# Altium PCB wifiPinBoard_1.pcbdoc (part 2 of 2)
Units mil, origin at the board's own origin, x right, y up, seen from the top; angles counter-clockwise.
Board outline 4044.61 x 2473.5 mil, 2 copper layers (Top Layer, Bottom Layer); 86 components, 80 nets, 330 pads, 327 vias.
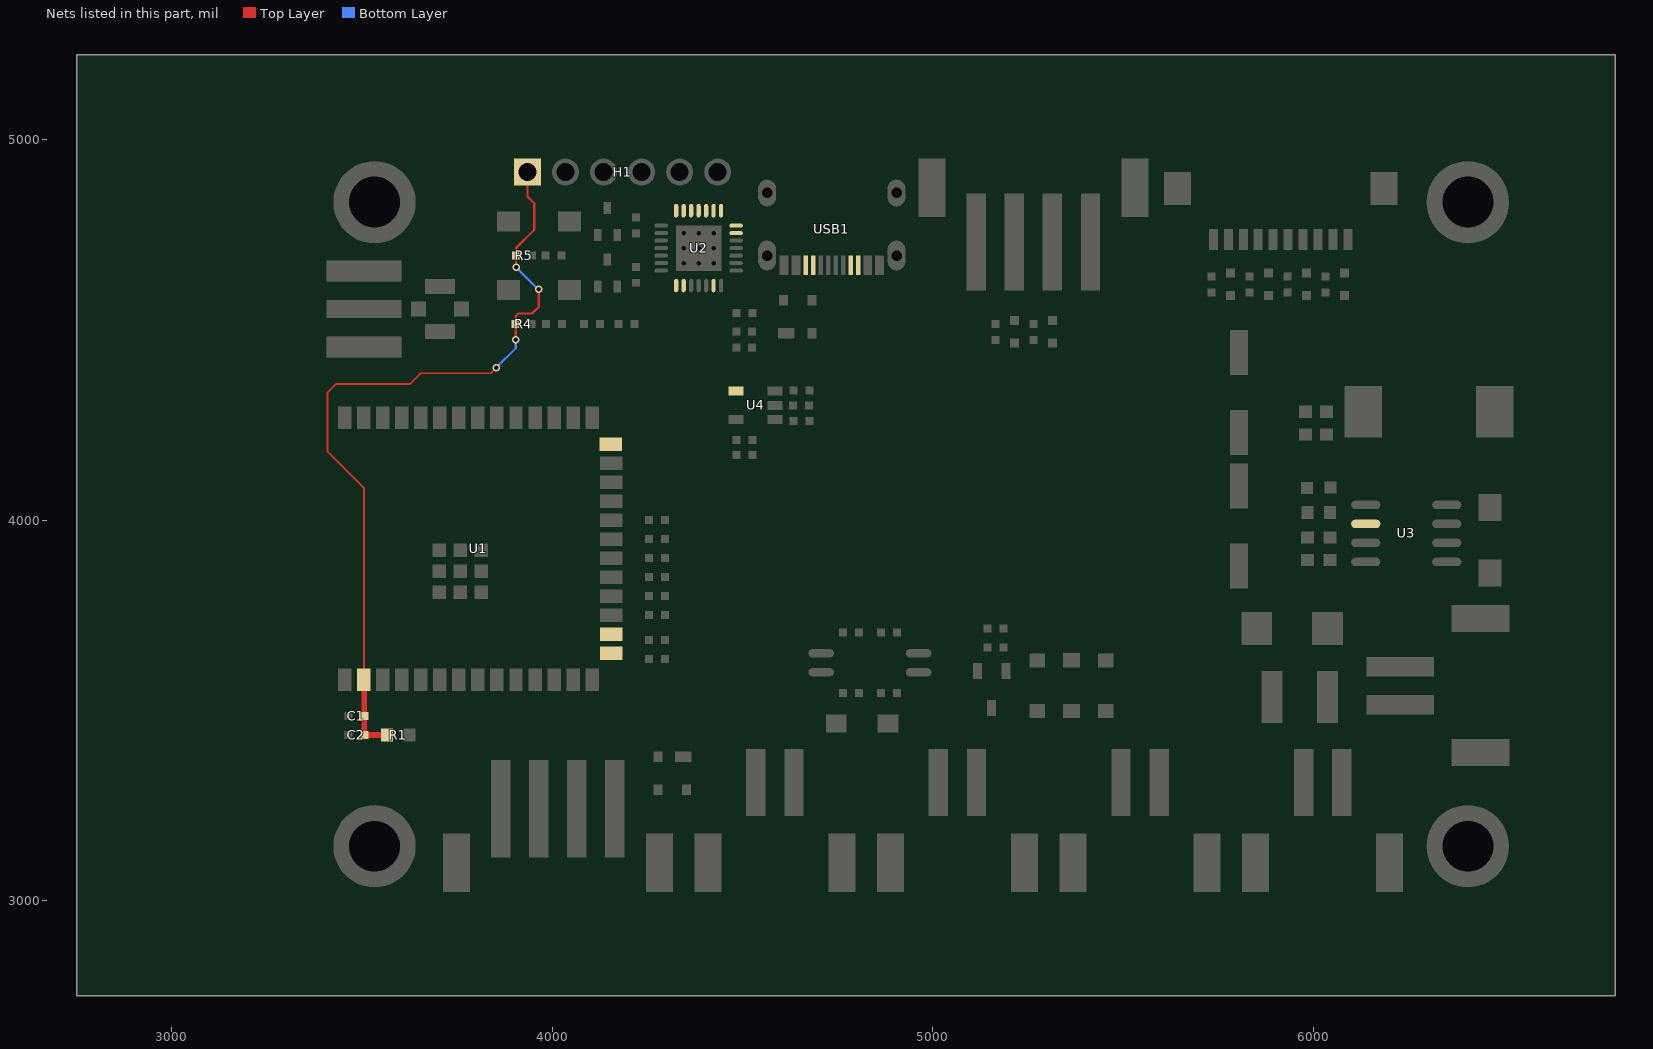
[diagram p2: the nets of this part, all layers, seen from the top]

## Via types
v1: diameter 19.68, hole 11.81, Top Layer to Bottom Layer, 286 vias
v2: diameter 62.99, hole 35.43, Top Layer to Bottom Layer, 22 vias
v3: diameter 19.7, hole 11.81, Top Layer to Bottom Layer, 17 vias
v4: diameter 27.56, hole 15.75, Top Layer to Bottom Layer, 2 vias

## Nets (pads, with @x,y where several pads share a name; then routed paths per layer and width w, separated by ;. In a path a pad name is that pad's centre, name@x,y a point inside that pad or via, vN(x,y) a via of type N, cw(c..) or ccw(c..) an arc to the next point about the centre after c; other vN are vias at no path point) (continued)
VDD3V3: C1.1 C2.1 H1.1 R1.2 R4.2 R5.2 U1.2 | length 2105.4
  Top Layer w5: U1.2@3504.8,3580.51 3504.8,4085.2 3409,4181 3409,4334.56 3432.79,4358.34 3626.34,4358.34 3654,4386 3838,4386 v1(3853,4401)
  Top Layer w6: v1(3904,4474) R4.2@3904,4515 3904,4536 3911,4543 3947,4543 3965,4561 v1(3965,4607) ; v1(3905,4665) R5.2@3905,4695 3905,4715 3953,4763 3953,4833 3935,4851 H1.1@3935,4915
  Top Layer w15: U1.2@3504.8,3580.51 3506,3579.32 C1.1@3506,3485 C2.1@3506,3435 R1.2@3565.3,3435
  Bottom Layer w6: v1(3853,4401) 3904,4452 v1(3904,4474) ; v1(3905,4665) 3963,4607 v1(3965,4607)
"": U1.15 U1.16 U1.26 U2.1 U2.2 U2.6 U2.13 U2.14 U2.15 U2.16 U2.17 U2.18 U2.19 U2.20 U2.21 U3.2 U4.4 USB1.A5 USB1.A8 USB1.B5 USB1.B8

## Polygon pours and split planes (outlines as drawn)
GND on Bottom Layer (solid, remove dead copper, pour order 0): 3513.11,4973.5 ccw(c3513.11,4855.39) 3395,4855.39 3395,3123.11 ccw(c3513.11,3123.11) 3513.11,3005 6426.5,3005 ccw(c6426.5,3123.11) 6544.61,3123.11 6544.61,4855.39 ccw(c6426.5,4855.39) 6426.5,4973.5
GND on Top Layer (solid, remove dead copper, pour order 1): 3513.11,4968.5 ccw(c3513.11,4850.39) 3395,4850.39 3395,3118.11 ccw(c3513.11,3118.11) 3513.11,3000 6426.5,3000 ccw(c6426.5,3118.11) 6544.61,3118.11 6544.61,4850.39 ccw(c6426.5,4850.39) 6426.5,4968.5

## Keep-outs
Board Outline Layer:
  lines w10 net "": 3395,3123.11 3395,4855.39 cw(c3513.11,4855.39) 3513.11,4973.5 6426.5,4973.5 cw(c6426.5,4855.39) 6544.61,4855.39 6544.61,3123.11 cw(c6426.5,3123.11) 6426.5,3005 3513.11,3005 cw(c3513.11,3123.11) 3395,3123.11

## Other copper
Top Layer:
  region net 12V: 6175,3910 6080,3910 6075,3915 5810.1,3915 5809.86,3855 6170,3855 6185,3870 6185,3900
  region net $1N33521: 6430,4355 6425,4350 6425,3990 6390,3955 6315,3955 6305,3945 6305,3885 6315,3875 6390,3875 6530,4015 6530,4350 6525,4355
  region net 12V: 5770,3906.66 5770,3480 5800,3450 5905,3450 5920,3465 5920,3819.57 5945.45,3856.66 5945.45,3906.66
  region net VCC: 6340,3640 6330,3650 6110,3650 6090,3630 6010,3630 5995,3615 5995,3460 6040,3415 6040,3214.45 6050.95,3203.49 6098.49,3203.49 6110,3215 6110,3545 6145,3580 6330,3580 6340,3590
  region net 5V: 6180,4025 6190,4035 6190,4382 6245,4437 6245,4664.09 6120,4789.09 6120,4814 6105,4829 6023,4829 5999,4805 5999,4713 6006,4706 6110,4706 6180,4636 6180,4550 6134,4504 5780,4504 5765,4489 5765,4385 5780,4370 5850,4370 5955,4265 6055,4265 6090,4230 6090,4030 6095,4025
  region net 5V: 4629,4779 4654,4804 4818.43,4804 4840.26,4782.17 4840.26,4669.92 4818.47,4669.92 4818.47,4737.53 4791,4765 4673,4765 4652,4744 4652,4675.51 4646.42,4669.93 4634.6,4669.93 4629,4675.53
  region net DTR: 4239.5,4627 4230.5,4634.5 4230.5,4613.5 4239.5,4621
  region net DTR: 4202,4621 4209.5,4613.5 4209.5,4634.5 4202,4627
  region net $1N10942: 4200.5,4669 4200.5,4663 4209.5,4655.5 4209.5,4676.5
  region net RTS: 4202,4751.5 4209.5,4745.25 4209.5,4762.75 4202,4756.5
  region net RTS: 4238,4756.5 4230.5,4762.75 4230.5,4745.25 4238,4751.5
  region net $1N10943: 4200.5,4793 4209.5,4785.5 4209.5,4806.5 4200.5,4799
  region net 5V: 4510.5,4501 4495.5,4506.5 4495.5,4485.5 4510.5,4491
  region net 5V: 4480,4521.5 4474.5,4506.5 4495.5,4506.5 4490,4521.5
  region net 5V: 4550.5,4501 4535.5,4506.5 4535.5,4485.5 4550.5,4491
  region net 5V: 4499.5,4501 4499.5,4491 4514.5,4485.5 4514.5,4506.5
  region net $1N10958: 4524,4564.5 4516.5,4555.5 4536.5,4555.5 4530,4564.5
  region net 5V: 4488.4,4570.5 4478.4,4570.5 4473.5,4555.5 4494.5,4555.5
  region net 5V: 4480,4519.5 4490,4519.5 4494.5,4534.5 4473.5,4534.5
  region net VDD3V3: 3507.3,3617.54 3502.3,3617.54 3496.05,3610.04 3513.55,3610.04
  region net VDD3V3: 3498.5,3528.48 3513.5,3528.48 3522.52,3550.98 3487.09,3550.98
  region net EN: 3557.3,3617.54 3552.3,3617.54 3546.05,3610.04 3563.55,3610.04
  region net IO6: 3701.8,3541.98 3707.8,3541.98 3715.3,3550.98 3694.3,3550.98
  region net IO7: 3751.8,3541.98 3757.8,3541.98 3765.3,3550.98 3744.3,3550.98
  region net IO17: 3901.8,3541.98 3907.8,3541.98 3915.3,3550.98 3894.3,3550.98
  region net IO18: 3951.8,3541.98 3957.8,3541.98 3965.3,3550.98 3944.3,3550.98
  region net IO19: 4057.8,3543.2 4065.3,3550.98 4044.3,3550.98 4051.8,3543.2
  region net IO20: 4131.52,3583.51 4122.52,3591.01 4122.52,3570.01 4131.52,3577.51
  region net IO9: 4193.72,3753 4184.72,3760.5 4184.72,3739.5 4193.72,3747
  region net IO10: 4193.72,3803 4184.72,3810.5 4184.72,3789.5 4193.72,3797
  region net IO11: 4193.72,3853 4184.72,3860.5 4184.72,3839.5 4193.72,3847
  region net IO12: 4193.72,3903 4184.72,3910.5 4184.72,3889.5 4193.72,3897
  region net IO13: 4193.72,3953 4184.72,3960.5 4184.72,3939.5 4193.72,3947
  region net IO14: 4193.72,4003 4184.72,4010.5 4184.72,3989.5 4193.72,3997
  region net IO0: 4107.81,4308.02 4101.81,4308.02 4094.3,4299.02 4115.31,4299.02
  region net RXD0: 3651.8,4308.02 3644.3,4299.02 3665.3,4299.02 3657.8,4308.02
  region net TXD0: 3607.8,4308.02 3601.8,4308.02 3594.3,4299.02 3615.3,4299.02
  region net VDD3V3: 3902,4675.5 3908,4675.5 3915.5,4684.5 3894.5,4684.5
  region net VDD3V3: 3908,4714.5 3902,4714.5 3894.5,4705.5 3915.5,4705.5
  region net EN: 3947.5,4677 3953.75,4684.5 3936.5,4684.5 3942.5,4677
  region net EN: 3966.5,4698 3957.5,4705.5 3957.5,4684.5 3966.5,4692
  region net EN: 3963.5,4698 3963.5,4692 3972.5,4684.5 3972.5,4705.5
  region net EN: 3980,4714.5 3972.5,4705.5 3993.5,4705.5 3986,4714.5
  region net EN: 4006,4788 4006,4782 4015,4774.5 4015,4795.5
  region net EN: 4084.24,4788 4075.24,4795.5 4075.24,4774.5 4084.24,4782
  region net VDD3V3: 3901,4534.5 3893.5,4525.5 3914.5,4525.5 3907,4534.5
  region net VDD3V3: 3907,4495.5 3914.5,4504.5 3893.5,4504.5 3901,4495.5
  region net IO0: 3965.5,4518 3956.5,4525.5 3956.5,4504.5 3965.5,4512
  region net IO0: 3964.5,4518 3964.5,4512 3973.5,4504.5 3973.5,4525.5
  region net IO0: 3987,4534.5 3981,4534.5 3973.5,4525.5 3994.5,4525.5
  region net IO0: 4006,4602 4015,4594.5 4015,4615.5 4006,4608
  region net IO0: 4084.24,4602 4084.24,4608 4075.24,4615.5 4075.24,4594.5
  region net VDD3V3: 3539,3442.5 3516.5,3445.5 3516.5,3424.5 3539,3427.5
  region net VDD3V3: 3498.5,3468 3495.5,3445.5 3516.5,3445.5 3513.5,3468
  region net VDD3V3: 3498.5,3452 3513.5,3452 3516.5,3474.5 3495.5,3474.5
  region net VDD3V3: 3498.5,3518 3495.5,3495.5 3516.5,3495.5 3513.5,3518
  region net VDD3V3: 3526.9,3442.5 3526.9,3427.5 3549.4,3418 3549.4,3452
  region net 3V3: 3663.1,3427.5 3663.1,3442.5 3640.6,3452 3640.6,3418
  region net IO9: 4234.5,3753 4234.5,3747 4243.5,3739.5 4243.5,3760.5
  region net $1N8464: 4315.5,3747 4315.5,3753 4306.5,3760.5 4306.5,3739.5
  region net IO10: 4234.5,3803 4234.5,3797 4243.5,3789.5 4243.5,3810.5
  region net $1N8479: 4315.5,3797 4315.5,3803 4306.5,3810.5 4306.5,3789.5
  region net IO11: 4234.5,3853 4234.5,3847 4243.5,3839.5 4243.5,3860.5
  region net IO12: 4234.5,3903 4234.5,3897 4243.5,3889.5 4243.5,3910.5
  region net IO13: 4235.5,3953 4235.5,3947 4244.5,3939.5 4244.5,3960.5
  region net IO14: 4234.5,4003 4234.5,3997 4243.5,3989.5 4243.5,4010.5
  region net RXD0: 4171,4495.5 4177,4495.5 4184.5,4504.5 4163.5,4504.5
  region net $1N13324: 4219,4534.5 4213,4534.5 4205.5,4525.5 4226.5,4525.5
  region net TXD0: 4087,4495.5 4094.5,4504.5 4073.5,4504.5 4081,4495.5
  region net $1N13323: 4129,4534.5 4123,4534.5 4115.5,4525.5 4136.5,4525.5
  region net SRC_RX2: 5962.19,4652.53 5962.19,4646.53 5971.19,4639.03 5971.19,4660.03
  region net SRC_RX2: 5986,4670.34 5980,4670.34 5972.5,4661.34 5993.5,4661.34
  region net SRC_TX2: 5862.19,4652.53 5862.19,4646.53 5871.19,4639.03 5871.19,4660.03
  region net SRC_TX2: 5886,4670.34 5880,4670.34 5872.5,4661.34 5893.5,4661.34
  region net $1N54194: 4274.6,3355.53 4280.6,3355.53 4288.1,3364.53 4267.1,3364.53
  region net $1N54194: 4256.78,3381.3 4256.78,3375.3 4265.78,3367.8 4265.78,3388.8
  region net $1N54195: 4258.31,3288.7 4265.78,3281.2 4265.78,3302.2 4258.31,3294.7
  region net $1N54195: 4280.6,3314.47 4274.6,3314.47 4267.1,3305.47 4288.1,3305.47
  region net 5V: 4332.61,3262.01 4340.59,3277.92 4340.59,3305.47 4324.68,3275.29
  region net 5V: 4386.72,3299.2 4364.22,3305.47 4364.22,3277.92 4386.72,3284.2
  region net EX_RXD: 5194.19,4527.53 5194.19,4521.53 5203.19,4514.03 5203.19,4535.03
  region net EX_RXD: 5212,4545.34 5204.5,4536.34 5225.5,4536.34 5218,4545.34
  region net EX_TXD: 5294.19,4527.53 5294.19,4521.53 5303.19,4514.03 5303.19,4535.03
  region net EX_TXD: 5312,4545.34 5304.5,4536.34 5325.5,4536.34 5318,4545.34
  region net IO7: 5262,4454.5 5268,4454.5 5275.5,4463.5 5254.5,4463.5
  region net EX_TXD: 5284,4519 5275.5,4526.5 5275.5,4505.5 5284,4513
  region net IO6: 5162,4454.5 5168,4454.5 5175.5,4463.5 5154.5,4463.5
  region net EX_RXD: 5182,4519 5175.5,4526.5 5175.5,4505.5 5182,4513
  region net 5V: 6093.18,4021.11 6111.3,4028.81 6111.3,4051.19 6089.78,4031.85
  region net $1N32414: 6090,3930 6111.3,3928.81 6111.3,3951.19 6090,3950
  region net $1N32414: 6075.3,3944.7 6075.3,3964.7 6062,3970.7 6062,3938.7
  region net 3V3: 4490.75,4229.85 4502.95,4252.35 4463.55,4252.35 4475.75,4229.85
  region net $1N37918: 4620.35,4336 4620.35,4346 4605.35,4350.75 4605.35,4327.15
  region net 5V: 4595.65,4222.35 4605.35,4252.35 4565.95,4252.35 4575.65,4222.35
  region net 5V: 4686,4300.5 4686.5,4330.5 4665.5,4330.5 4666,4300.5
  region net 5V: 4666,4381.5 4665.5,4351.5 4686.5,4351.5 4686,4381.5
  region net $1N37918: 4608.5,4336 4623.5,4330.5 4623.5,4351.5 4608.5,4346
  region net $1N71351: 5988.52,4052 5978.52,4052 5969.4,4037 6001.02,4037
  region net 5V: 6075.6,4015 6075.6,4025 6060.6,4037 6060.6,4003
  region net $1N71351: 5988.52,4054.11 5999.27,4069.11 5967.77,4069.11 5978.52,4054.11
  region net 5V: 4666,4220.5 4686,4220.5 4686.5,4250.5 4665.5,4250.5
  region net 5V: 4686,4280 4666,4280 4665.5,4271.5 4686.5,4271.5
  region net 3V3: 4476.5,4178 4491.5,4178 4494.5,4200.5 4473.5,4200.5
  region net 3V3: 4490.75,4244 4475.75,4244 4473.5,4221.5 4494.5,4221.5
  region net 3V3: 4476.5,4204 4473.5,4181.5 4494.5,4181.5 4491.5,4204
  region net 3V3: 4491.5,4138 4494.5,4160.5 4473.5,4160.5 4476.5,4138
  region net IO17: 6036,4579.5 6043.5,4588.5 6022.5,4588.5 6030,4579.5
  region net SRC_RX4: 6062.19,4652.53 6062.19,4646.53 6071.19,4639.03 6071.19,4660.03
  region net SRC_RX4: 6086,4670.34 6080,4670.34 6072.5,4661.34 6093.5,4661.34
  region net SRC_TX4: 5762.19,4652.53 5762.19,4646.53 5771.19,4639.03 5771.19,4660.03
  region net SRC_TX4: 5786,4670.34 5780,4670.34 5772.5,4661.34 5793.5,4661.34
  region net IO17: 5930,4579.5 5936,4579.5 5943.5,4588.5 5922.5,4588.5
  region net IO18: 5836,4579.5 5843.5,4588.5 5822.5,4588.5 5830,4579.5
  region net IO18: 5730,4579.5 5736,4579.5 5743.5,4588.5 5722.5,4588.5
  region net SRC_TX4: 5752.5,4644 5743.5,4651.5 5743.5,4630.5 5752.5,4638
  region net IO20: 4234.5,3688 4234.5,3682 4243.5,3674.5 4243.5,3695.5
  region net $1N54194: 4315.5,3688 4306.5,3695.5 4306.5,3674.5 4315.5,3682
  region net IO19: 4251,3615.5 4257,3615.5 4264.5,3624.5 4243.5,3624.5
  region net $1N54195: 4315.5,3638 4306.5,3645.5 4306.5,3624.5 4315.5,3632
  region net USB-D-: 4761.53,4635.33 4767.53,4635.33 4770.44,4644.33 4758.62,4644.33
  region net USB-D-: 4767.53,4704.51 4761.53,4704.51 4758.62,4695.51 4770.44,4695.51
  region net USB-D+: 4747.84,4635.33 4750.75,4644.33 4738.93,4644.33 4741.84,4635.33
  region net USB-D-: 4722.16,4704.51 4719.25,4695.51 4731.07,4695.51 4728.16,4704.51
  region net USB-D+: 4708.47,4635.33 4711.38,4644.33 4699.56,4644.33 4702.47,4635.33
  region net $1N10942: 4122.41,4724.9 4129.25,4733.9 4109.57,4733.9 4116.41,4724.9
  region net RTS: 4187.93,4751.5 4187.93,4756.5 4180.43,4762.75 4180.43,4745.25
  region net EN: 4126.16,4823.35 4126.16,4817.35 4135.16,4809.85 4135.16,4830.85
  region net EN: 4163.84,4817.35 4163.84,4823.35 4154.84,4830.85 4154.84,4809.85
  region net $1N10943: 4122.41,4639.4 4116.41,4639.4 4109.57,4630.4 4129.25,4630.4
  region net DTR: 4189.43,4611.65 4189.43,4617.65 4180.43,4625.15 4180.43,4604.15
  region net IO0: 4147.5,4662.1 4153.75,4669.6 4136.25,4669.6 4142.5,4662.1
  region net USB-D+: 4685.4,4514.47 4679.4,4514.47 4671.9,4505.47 4692.9,4505.47
  region net USB-D+: 4679.4,4468.92 4685.4,4468.92 4692.9,4477.92 4671.9,4477.92
  region net USB-D-: 4679.4,4555.53 4685.4,4555.53 4692.9,4564.53 4671.9,4564.53
  region net USB-D-: 4679.4,4600.4 4671.9,4592.08 4692.9,4592.08 4685.4,4600.4
  region net 5V: 4602.6,4552.6 4612.6,4552.6 4619.41,4564.53 4595.78,4564.53
  region net 5V: 4602.6,4601.6 4595.78,4592.08 4619.41,4592.08 4612.6,4601.6
  region net $1N83572: 5197.4,3635.6 5187.4,3635.6 5180.59,3624.69 5204.21,3624.69
  region net $1N82815: 5211.81,3491.38 5211.81,3521.38 5166.81,3527.44 5166.81,3485.31
  region net $1N82815: 5098.19,3521 5098.19,3491 5143.19,3485.31 5143.19,3527.44
  region net $1N83572: 5191,3642 5196.5,3654.5 5175.5,3654.5 5181,3642
  region net $1N83572: 5181,3690.5 5175.5,3675.5 5196.5,3675.5 5191,3690.5
  region net $1N83572: 5181,3689.5 5191,3689.5 5196.5,3704.5 5175.5,3704.5
  region net $1N8479: 5147,3734.5 5141,3734.5 5133.5,3725.5 5154.5,3725.5
  region net 12V: 5389.13,3513.37 5389.13,3483.37 5434.13,3480.35 5434.13,3516.97
  region net 12V: 5520.87,3483.66 5520.87,3513.66 5475.87,3516.97 5475.87,3480.35
  region net $1N90372: 4704.14,3470 4704.14,3460 4719.14,3447.5 4719.14,3482.5
  region net $1N90372: 4789.26,3470 4774.26,3482.5 4774.26,3447.5 4789.26,3460
  region net $1N90245: 4911,3570.5 4901,3570.5 4895.5,3555.5 4916.5,3555.5
  region net $1N90372: 4859,3519.5 4869,3519.5 4874.5,3534.5 4853.5,3534.5
  region net 5V: 5010,3610 4985.79,3611.02 4985.79,3588.98 5010,3590
  region net $1N90245: 4916,3645 4940.51,3638.98 4940.51,3661.02 4916,3655
  region net $1N107623: 4754.31,3605 4729.49,3611.02 4729.49,3588.98 4754.31,3595
  region net $1N8464: 4749.1,3653 4732.84,3660.5 4732.84,3639.5 4749.1,3647
  region net 12V: 5610.17,3176.73 5620.76,3221.73 5569.58,3221.73 5580.17,3176.73
  region net 12V: 5608,3443.9 5578,3443.9 5569.58,3398.9 5620.76,3398.9
  region net $1N82815: 5510.18,3176.73 5520.77,3221.73 5469.59,3221.73 5480.18,3176.73
  region net $1N82815: 5424.59,3325.32 5424.59,3295.32 5469.59,3257.82 5469.59,3362.82
  region net 12V: 5100.37,3416.37 5089.78,3398.9 5140.96,3398.9 5130.37,3416.37
  region net $1N82815: 5000.38,3443.9 4989.79,3398.9 5040.97,3398.9 5030.38,3443.9
  region net $1N82815: 5030.38,3176.73 5040.97,3221.73 4989.79,3221.73 5000.38,3176.73
  region net VCC: 6363.27,3629.97 6318.27,3640.57 6318.27,3589.38 6363.27,3599.97
  region net VCC: 6059.98,3176.73 6089.98,3176.73 6100.57,3221.73 6049.38,3221.73
  region net $1N90372: 4530.58,3413.9 4518.08,3398.9 4553.08,3398.9 4540.58,3413.9
  region net $1N90372: 4545.58,3191.73 4561.17,3221.73 4509.99,3221.73 4525.58,3191.73
  region net $1N54194: 3975,3083.64 3990.59,3113.64 3939.41,3113.64 3955,3083.64
  region net $1N54194: 3962,3378.55 3954.5,3369.55 3975.5,3369.55 3968,3378.55
  region net $1N54195: 4075,3083.64 4090.59,3113.64 4039.41,3113.64 4055,3083.64
  region net $1N54195: 4068,3378.55 4062,3378.55 4054.5,3369.55 4075.5,3369.55
  region net 5V: 4175,3083.64 4190.59,3113.64 4139.41,3113.64 4155,3083.64
  region net 5V: 4213.09,3234.1 4213.09,3249.1 4190.59,3267.85 4190.59,3215.35
  region net 3V3: 5425,4889.13 5405,4889.13 5389.41,4859.13 5440.59,4859.13
  region net 3V3: 5422.5,4580.73 5440.59,4603.23 5389.41,4603.23 5407.5,4580.73
  region net EX_TXD: 5325,4889.13 5305,4889.13 5289.41,4859.13 5340.59,4859.13
  region net EX_TXD: 5312,4594.23 5318,4594.23 5325.5,4603.23 5304.5,4603.23
  region net EX_RXD: 5212,4594.23 5218,4594.23 5225.5,4603.23 5204.5,4603.23
  region net EX_RXD: 5225,4889.13 5205,4889.13 5189.41,4859.13 5240.59,4859.13
  region net $1N82815: 5350,3595 5380,3595 5387.64,3612.93 5342.36,3612.93
  region net 12V: 5350,3455 5380,3455 5387.64,3479.67 5342.36,3479.67
  region net 12V: 5432.64,3513.37 5387.64,3517.07 5387.64,3479.67 5432.64,3483.37
  region net $1N8464: 4767,3724.5 4761,3724.5 4753.5,3715.5 4774.5,3715.5
  region net $1N8464: 4761,3685.5 4767,3685.5 4774.5,3694.5 4753.5,3694.5
  region net $1N106267: 3599.22,4565 3599.22,4545 3629.22,4535.31 3629.22,4574.69
  region net $1N107623: 4811,3570.5 4801,3570.5 4795.5,3555.5 4816.5,3555.5
  region net 3V3: 4738.5,3540 4753.5,3534.5 4753.5,3555.5 4738.5,3550
  region net $1N8464: 4909,3685.5 4916.5,3694.5 4895.5,3694.5 4903,3685.5
  region net DTR: 4283.6,4641.4 4289.6,4641.4 4297.1,4650.4 4276.1,4650.4
  region net $1N13324: 4260.79,4698.3 4260.79,4692.3 4274.4,4689.8 4274.4,4700.8
  region net $1N13323: 4260.79,4718 4260.79,4712 4274.4,4709.5 4274.4,4720.5
  region net RTS: 4262,4737.2 4262,4732.2 4274.4,4729.2 4274.4,4740.2
  region net $1N10958: 4508.4,4672.6 4508.4,4678.6 4495.6,4681.1 4495.6,4670.1
  region net 5V: 4478.4,4635.4 4488.4,4635.4 4500.9,4654.43 4465.9,4654.43
  region net 5V: 4464.6,4621.6 4445.57,4634.1 4445.57,4599.1 4464.6,4611.6
  region net USB-D-: 4401.7,4590.79 4407.7,4590.79 4410.2,4604.4 4399.2,4604.4
  region net USB-D+: 4388,4590.79 4390.5,4604.4 4379.5,4604.4 4382,4590.79
  region net $1N106267: 3633.43,4565 3603.43,4578.62 3603.43,4531.38 3633.43,4545
  region net EN: 4299.64,4917.22 4290.29,4874.53 4294.53,4870.29 4337.22,4879.64
  region net VDD3V3: 3938,4870.57 3945.5,4879.57 3924.5,4879.57 3932,4870.57
  region net 5V: 6085.81,4756.95 6071.95,4771.37 6064.6,4765.63 6064.6,4710.51
  region net SRC_RX4: 5977.05,4701.95 5984.55,4710.51 5963.55,4710.51 5971.05,4701.95
  region net SRC_RX2: 5937.68,4701.51 5945.18,4710.51 5924.18,4710.51 5931.68,4701.51
  region net SRC_RX2: 5929.68,4780.63 5922.87,4765.63 5946.49,4765.63 5939.68,4780.63
  region net SRC_TX2: 5898.31,4701.51 5905.81,4710.51 5884.81,4710.51 5892.31,4701.51
  region net SRC_TX2: 5890.31,4780.63 5883.5,4765.63 5907.12,4765.63 5900.31,4780.63
  region net SRC_TX4: 5858.94,4701.51 5866.44,4710.51 5845.44,4710.51 5852.94,4701.51
  region net $1N13324: 4259.81,4687.92 4270.03,4692.3 4270.03,4698.3 4259.81,4702.68
  region net $1N13323: 4236.51,4707.62 4246.73,4712 4246.73,4718 4236.51,4722.38
  region net VDD3V3: 3957.62,4600.49 3962,4590.27 3968,4590.27 3972.38,4600.49
  region net VDD3V3: 3912.38,4671.51 3908,4681.73 3902,4681.73 3897.62,4671.51
  region net USB-D-: 4425.62,4572.82 4415.29,4576.95 4411.05,4572.71 4415.18,4562.38
  region net USB-D-: 4417.62,4486.49 4422,4476.27 4428,4476.27 4432.38,4486.49
  region net VDD3V3: 3843.18,4401.62 3839.4,4390.94 3842.94,4387.4 3853.62,4391.18
  region net $1N54194: 4338.48,3692.39 4328.26,3688 4328.26,3682 4338.48,3677.61
  region net $1N54195: 4338.48,3642.39 4328.26,3638 4328.26,3632 4338.48,3627.61
  region net $1N54194: 4425.17,3369.62 4421.04,3359.28 4425.28,3355.04 4435.62,3359.17
  region net $1N54195: 4420.48,3336.39 4410.26,3332 4410.26,3326 4420.48,3321.61
  region net IO17: 4519.61,3884.48 4524,3874.26 4530,3874.26 4534.39,3884.48
  region net IO18: 5051.52,3957.61 5061.74,3962 5061.74,3968 5051.52,3972.39
  region net IO17: 5074.83,3936.38 5078.96,3946.72 5074.72,3950.96 5064.38,3946.83
  region net IO18: 4491.61,3902.48 4496,3892.26 4502,3892.26 4506.39,3902.48
  region net IO7: 4946.38,3997.17 4956.72,3993.04 4960.96,3997.28 4956.83,4007.62
  region net IO6: 4997.52,3999.61 5007.74,4004 5007.74,4010 4997.52,4014.39
  region net IO7: 4537.61,3976.48 4542,3966.26 4548,3966.26 4552.39,3976.48
  region net IO6: 4563.61,3952.48 4568,3942.26 4574,3942.26 4578.39,3952.48
  region net $1N8479: 5088.38,3889.17 5098.72,3885.04 5102.96,3889.28 5098.83,3899.62
  region net $1N8464: 4471.77,3795.69 4461.96,3791 4462.58,3785 4473.27,3780.99
  region net $1N8479: 4469.17,3825.62 4465.04,3815.28 4469.28,3811.04 4479.62,3815.17
  region net $1N8464: 4756.99,3784.27 4761,3773.58 4767,3772.96 4771.69,3782.77
  region net 3V3: 5263.33,4020.11 5260.5,4034.43 5245.5,4034.43 5242.67,4020.11
  region net 3V3: 4605.25,4065.86 4597.13,4053.74 4607.74,4043.13 4619.86,4051.25
  region net 3V3: 4719.51,3537.62 4729.73,3540 4729.73,3550 4719.51,3552.38
  region net $1N13323: 4118.62,4543.49 4123,4533.27 4129,4533.27 4133.38,4543.49
  region net $1N13324: 4208.62,4543.49 4213,4533.27 4219,4533.27 4223.38,4543.49
  region net $1N54194: 3988.62,3080.95 3975,3113.66 3955,3113.66 3941.38,3080.95
  region net 5V: 4188.62,3080.95 4175,3113.66 4155,3113.66 4141.38,3080.95
  region net $1N54195: 4088.62,3080.95 4075,3113.66 4055,3113.66 4041.38,3080.95
  region net $1N90372: 4559.2,3080.94 4545.58,3113.66 4525.58,3113.66 4511.95,3080.96
  region net $1N82815: 5039,3080.94 5030.38,3113.66 5000.38,3113.67 4991.76,3080.96
  region net 12V: 5618.8,3080.95 5610.17,3113.66 5580.17,3113.66 5571.55,3080.95
  region net $1N82815: 5518.8,3080.94 5510.18,3113.66 5480.18,3113.67 5471.56,3080.96
  region net VCC: 6098.6,3080.95 6089.98,3113.66 6059.98,3113.66 6051.35,3080.95
  region net VCC: 6459.05,3638.6 6426.34,3629.97 6426.34,3599.97 6459.05,3591.35
  region net EX_RXD: 5191.38,4897.55 5205,4864.84 5225,4864.84 5238.62,4897.55
  region net EX_TXD: 5291.38,4897.55 5305,4864.84 5325,4864.84 5338.62,4897.55
  region net 3V3: 5391.38,4897.55 5405,4864.84 5425,4864.84 5438.62,4897.55
  region net VDD3V3: 3911.38,4480.51 3907,4490.73 3901,4490.73 3896.62,4480.51
  region net IO0: 4257.18,4569.62 4253.05,4559.29 4257.29,4555.05 4267.62,4559.18
  region net 5V: 6055.39,4897.55 6069.02,4864.84 6089.02,4864.84 6102.64,4897.55
  region net SRC_RX2: 5955.39,4897.55 5974.02,4869.02 5984.02,4869.02 6002.64,4897.55
  region net SRC_TX2: 5856.06,4896.83 5875,4864.69 5885,4865 5903.28,4898.3
Bottom Layer:
  region net 5V: 4730,4805 4720,4795 4720,4775 4730,4765 6105,4765 6120,4780 6120,4815 6105,4830 6025,4830 6000,4805
  region net IO0: 4408.43,4891.56 4432,4854.76 4438,4854.76 4461.57,4891.56
  region net $1N13324: 4208.43,4891.56 4232,4854.76 4238,4854.76 4261.57,4891.56
  region net $1N13323: 4108.43,4891.56 4132,4854.76 4138,4854.76 4161.57,4891.56
  region net $1N13324: 4243.48,4695.92 4239.35,4685.59 4243.59,4681.35 4253.92,4685.48
  region net $1N13324: 4263.12,4694.68 4267.25,4705.01 4263.01,4709.25 4252.68,4705.12
  region net $1N13323: 4220.18,4715.62 4216.05,4705.29 4220.29,4701.05 4230.62,4705.18
  region net $1N13323: 4239.82,4714.38 4243.95,4724.71 4239.71,4728.95 4229.38,4724.82
  region net VDD3V3: 3964.2,4616.81 3954,4620.24 3950.38,4615.38 3955.37,4604.98
  region net VDD3V3: 3904.38,4655.18 3914.71,4651.05 3918.95,4655.29 3914.82,4665.62
  region net USB-D-: 4417.62,4556.49 4422,4546.27 4428,4546.27 4432.38,4556.49
  region net USB-D-: 4432.38,4499.51 4428,4509.73 4422,4509.73 4417.62,4499.51
  region net VDD3V3: 3862.82,4400.38 3866.95,4410.71 3862.71,4414.95 3852.38,4410.82
  region net $1N54194: 4344.38,3675.17 4354.72,3671.04 4358.96,3675.28 4354.83,3685.62
  region net $1N54195: 4351.52,3627.61 4361.74,3632 4361.74,3638 4351.52,3642.39
  region net $1N54194: 4442.39,3375.52 4438,3385.74 4432,3385.74 4427.61,3375.52
  region net $1N54195: 4427.62,3338.83 4418.27,3341.97 4414.03,3337.73 4417.17,3328.38
  region net IO17: 4536.83,3890.38 4540.96,3900.72 4536.72,3904.96 4526.38,3900.83
  region net IO18: 5035.17,3965.62 5031.04,3955.28 5035.28,3951.04 5045.62,3955.17
  region net IO17: 5055.17,3937.62 5051.04,3927.28 5055.28,3923.04 5065.62,3927.17
  region net IO18: 4508.83,3908.38 4512.96,3918.72 4508.72,3922.96 4498.38,3918.83
  region net IO7: 4940.48,4014.39 4930.26,4010 4930.26,4004 4940.48,3999.61
  region net IO6: 4981.17,4007.62 4977.04,3997.28 4981.28,3993.04 4991.62,3997.17
  region net IO7: 4554.83,3982.38 4558.96,3992.72 4554.72,3996.96 4544.38,3992.83
  region net IO6: 4580.83,3958.38 4584.96,3968.72 4580.72,3972.96 4570.38,3968.83
  region net $1N8479: 5082.48,3906.39 5072.26,3902 5072.26,3896 5082.48,3891.61
  region net $1N8464: 4485.52,3781.61 4495.74,3786 4495.74,3792 4485.52,3796.39
  region net $1N8479: 4485.52,3817.61 4495.74,3822 4495.74,3828 4485.52,3832.39
  region net $1N8464: 4758.48,3797.39 4748.26,3793 4748.26,3787 4758.48,3782.61
  region net 3V3: 5243.89,4021.33 5229.57,4018.5 5229.57,4003.5 5243.89,4000.67
  region net 3V3: 4628.11,4054.67 4642.43,4057.5 4642.43,4072.5 4628.11,4075.33
  region net 3V3: 4617,3552.13 4627.22,3554.51 4627.22,3564.51 4617,3566.9
  region net 3V3: 4713.62,3554.82 4704.7,3560.37 4697.63,3553.3 4703.18,3544.38
  region net $1N13323: 4135.82,4549.38 4139.95,4559.71 4135.71,4563.95 4125.38,4559.82
  region net $1N13324: 4223.38,4556.51 4219,4566.73 4213,4566.73 4208.62,4556.51
  region net 12V: 5146.81,3058.15 5163.84,3087.37 5142.63,3108.59 5113.4,3091.55
  region net 12V: 5597.15,3091.55 5567.92,3108.59 5546.71,3087.37 5563.74,3058.15
  region net VDD3V3: 3896.62,4467.49 3901,4457.27 3907,4457.27 3911.38,4467.49
  region net IO0: 4274.38,4575.51 4270,4585 4264,4585 4259.62,4575.51

## Silkscreen, mask and mechanical layers (free items; w line width, h text height)
Top Silkscreen Layer:
  text "RST" at 3810,4690 h39.37
  text "GND" at 5745,4657 h39.37
  text "RX" at 5853.1,4657 h39.37
  text "TX" at 5931.9,4657 h39.37
  text "5V" at 6035,4657 h39.37
  text "UART" at 5445,4645 h59.06
  text "UART-SRC" at 6135,4635 h59.06
  text "GND" at 5080,4555 h39.37
  text "RXD" at 5180,4555 h39.37
  text "TXD" at 5280,4555 h39.37
  text "3V3" at 5380,4555 h39.37
  text "Uart-TTL" at 4720,4545 h59.06
  text "BOT" at 3810,4510 h39.37
  text "Drip-Box" at 4815,4115 h157.48
  text "Ver-1.1" at 4814.27,4029.19 h78.74
  text "(●'◡'●)????" at 4815,3945 h78.74
  text "DC12+" at 6110,3655 h59.06
  text "Switch" at 4475,3415 h59.06
  text "-" at 4990.2,3395 h78.74
  text "+" at 5090.2,3395 h78.74
  text "-" at 5470,3395 h78.74
  text "+" at 5570,3395 h78.74
  text "USB1" at 3695,3255 h59.06
  text "←Elect→" at 5185,3255 h59.06
  text "DC12+" at 6115,3255 h59.06
Bottom Silkscreen Layer:
  text "3V3" at 3971,4805 h39.37
  text "GND" at 4071,4805 h39.37
  text "TXD" at 4171,4805 h39.37
  text "RXD" at 4271,4805 h39.37
  text "RST" at 4371,4805 h39.37
  text "DTR" at 4471,4805 h39.37